# EAGLE board heating-controller (EAGLE 6.4)
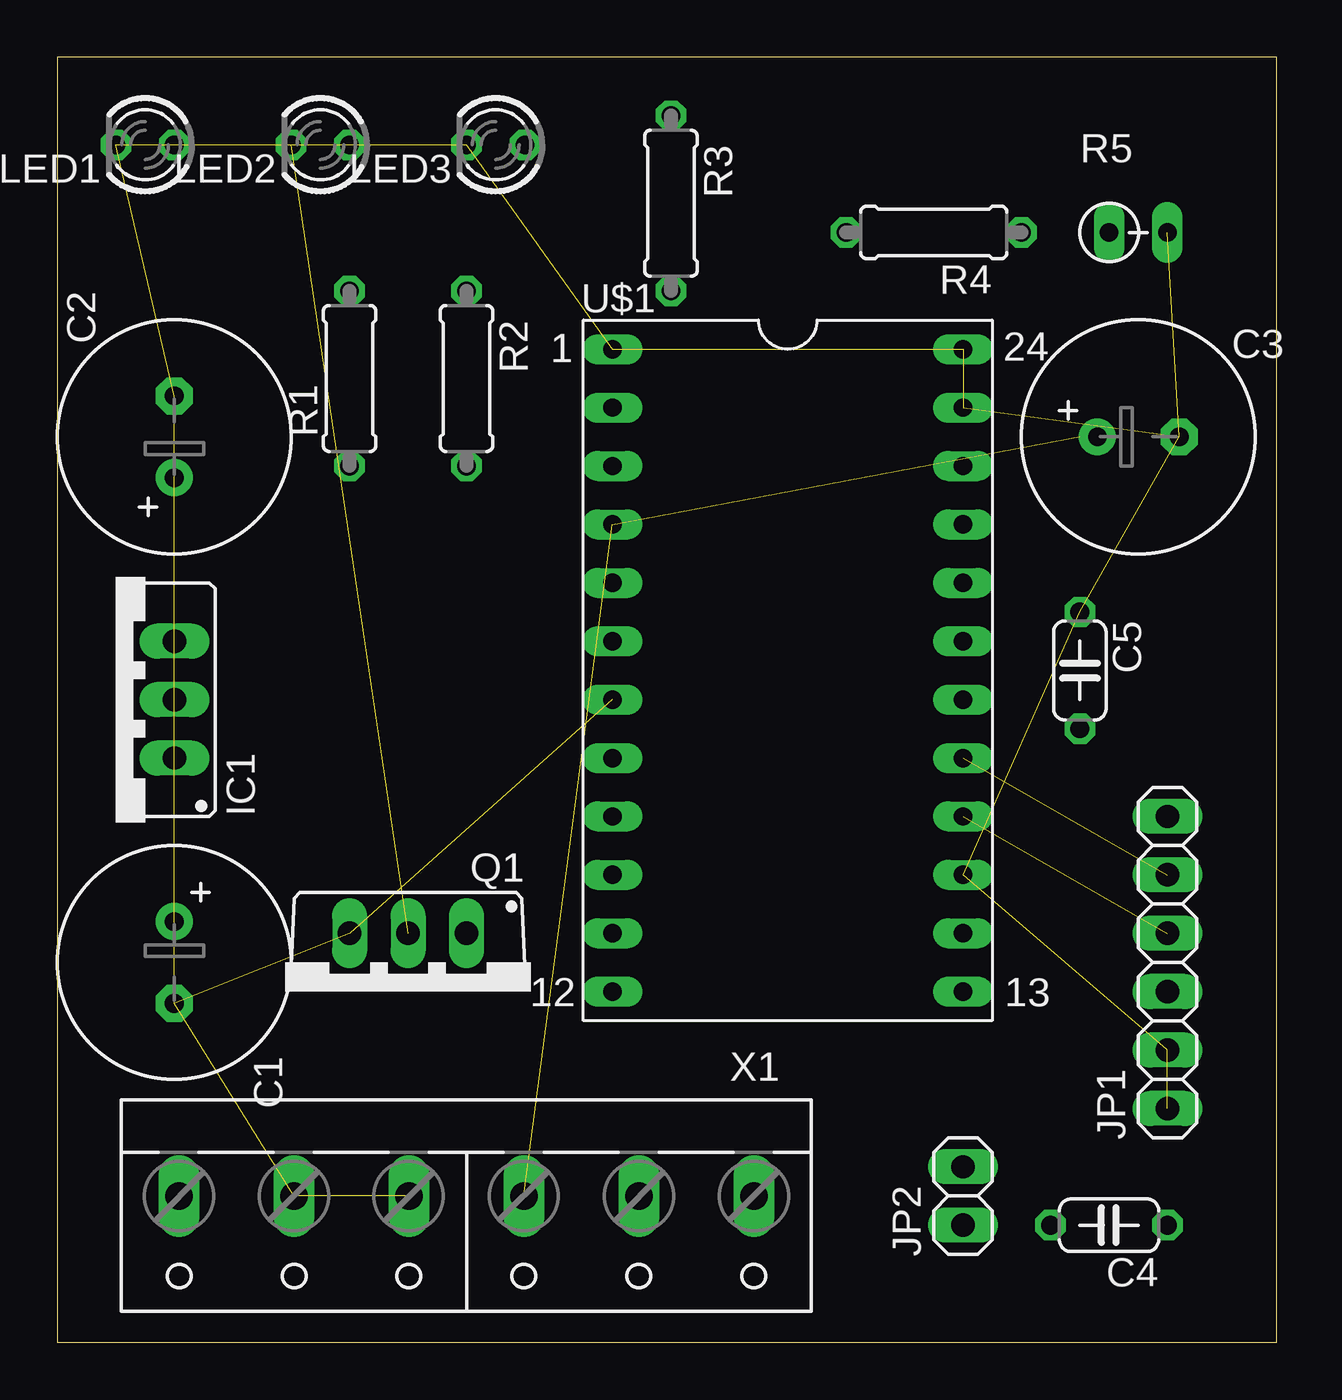
[diagram p0: board, top side]
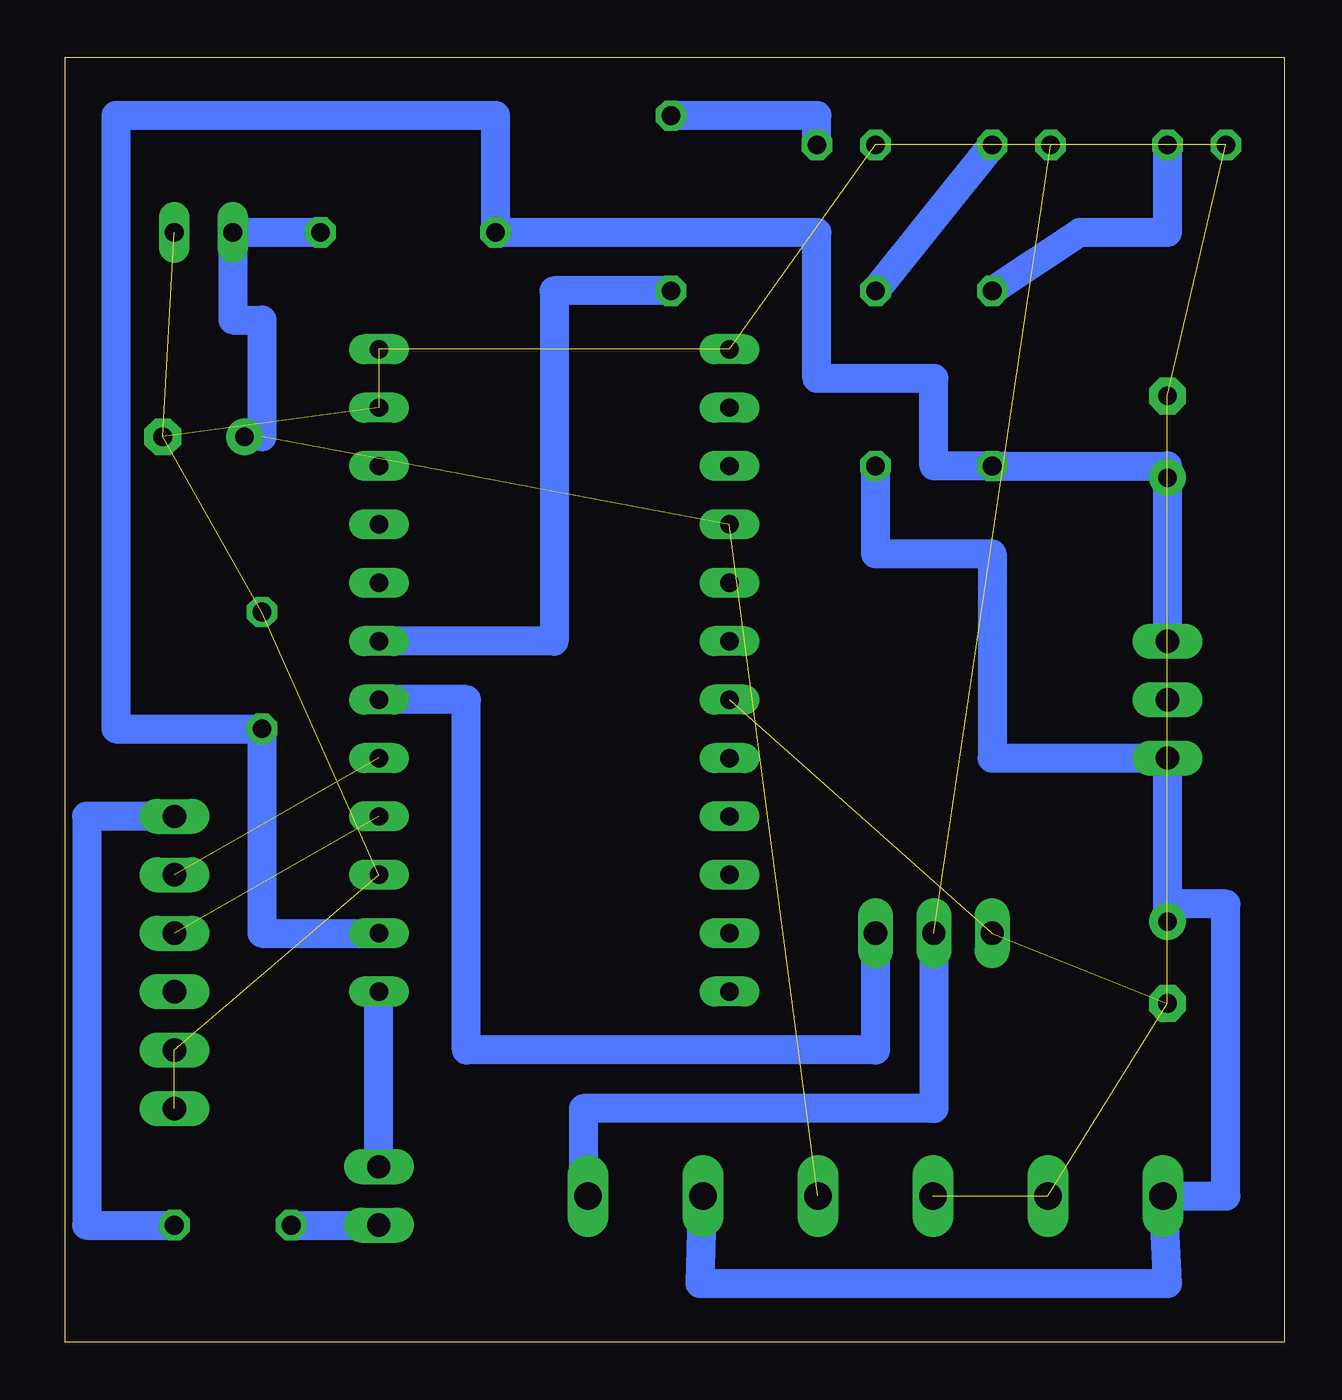
[diagram p1: board, bottom side, seen from below]

Size 53.01 x 55.87 mm. Coordinates in mm from the lower left corner, seen from the top.
Outline: 0,0 53.01,0 53.01,55.87 0,55.87 0,0
Copper layers (1*16): Top 0.035mm / dielectric 1.5mm / Bottom 0.035mm
Design rules "default": minimum track width 10mil, minimum drill 24mil, track to track 8mil, track to pad 8mil, pad to pad 8mil, via to via 8mil, smd to smd 8mil, copper to edge 40mil, drill to drill 8mil, minimum pad ring 10mil, minimum via ring 8mil, stop-mask expansion 4mil, vias tented up to drill 0mil, thermal gap 10mil

## Footprints (pad centres in the part's own frame; a part is rotated, then mirrored left to right if it is on the bottom)
E3,5-10 = drill 0.813 pad 1.6: + -1.778,0 | drill 0.813 pad 1.6 octagon: - 1.778,0
C050-024X044 = drill 0.813 octagon: 1 -2.54,0; 2 2.54,0
78XXS = drill 1.016 long: GND 0,-2.54; IN -2.54,-2.54; OUT 2.54,-2.54
1X06 = drill 1.016 long: 1 -6.35,0; 2 -3.81,0; 3 -1.27,0; 4 1.27,0; 5 3.81,0; 6 6.35,0
1X02 = drill 1.016 long: 1 -1.27,0; 2 1.27,0
LED3MM = drill 0.813 octagon: A -1.27,0; K 1.27,0
TO220BV = drill 1.016 long: D 0,-2.54; G -2.54,-2.54; S 2.54,-2.54
0207/7 = drill 0.813 octagon: 1 -3.81,0; 2 3.81,0
RS-2,5 = drill 0.813 long: 1 -1.27,0; 2 1.27,0
DIL24-6 = drill 0.8 long: 1 -7.62,13.97; 2 -7.62,11.43; 3 -7.62,8.89; 4 -7.62,6.35; 5 -7.62,3.81; 6 -7.62,1.27; 7 -7.62,-1.27; 8 -7.62,-3.81; 9 -7.62,-6.35; 10 -7.62,-8.89; 11 -7.62,-11.43; 12 -7.62,-13.97; 13 7.62,-13.97; 14 7.62,-11.43; 15 7.62,-8.89; 16 7.62,-6.35; 17 7.62,-3.81; 18 7.62,-1.27; 19 7.62,1.27; 20 7.62,3.81; 21 7.62,6.35; 22 7.62,8.89; 23 7.62,11.43; 24 7.62,13.97
W237-6 = drill 1.194 long: 1 -12.5,-1.27; 2 -7.5,-1.27; 3 -2.5,-1.27; 4 2.5,-1.27; 5 7.5,-1.27; 6 12.5,-1.27

## Placement (x,y rotation side)
C1  100uF  [E3,5-10]  5.08,16.51 270 top
C2  100uF  [E3,5-10]  5.08,39.37 90 top
C3  4.7uF  [E3,5-10]  46.99,39.37 0 top
C4  100nF  [C050-024X044]  45.72,5.08 180 top
C5  100nF  [C050-024X044]  44.45,29.21 270 top
IC1  AP1117T33L-U  [78XXS]  2.54,27.94 90 top
JP1  [1X06]  48.26,16.51 90 top
JP2  [1X02]  39.37,6.35 90 top
LED1  [LED3MM]  3.81,52.07 180 top
LED2  [LED3MM]  11.43,52.07 180 top
LED3  [LED3MM]  19.05,52.07 180 top
Q1  IRLB8721PBF  [TO220BV]  15.24,15.24 180 top
R1  220R  [0207/7]  12.7,41.91 90 top
R2  1K  [0207/7]  17.78,41.91 270 top
R3  220R  [0207/7]  26.67,49.53 270 top
R4  1K  [0207/7]  38.1,48.26 180 top
R5  538-0806  [RS-2,5]  46.99,48.26 0 top
U$1  PANSTAMPPANSTAMP  [DIL24-6]  31.75,29.21 0 top
X1  [W237-6]  17.78,5.08 180 top

## Library data of the parts
C1-C5 R1-R4 = rcl
IC1 = v-reg
JP1 JP2 = pinhead
LED1-LED3 = led
Q1 = transistor-power
R5 = varistor
U$1 = panstamp
X1 = con-wago-500; OC_FARNELL: unknown; OC_NEWARK: unknown

## Nets
+5V: JP1.3
+12V: C1.+ IC1.IN R2.2 X1.2 X1.6
GND: C1.- C2.- C3.- C5.1 IC1.GND JP1.1 JP1.2 LED1.K LED3.K Q1.S R5.2 U$1.1 U$1.7 U$1.15 U$1.23 U$1.24 X1.4 X1.5
N$1: C3.+ R4.1 R5.1 U$1.4 X1.3
N$2: R3.2 U$1.19
N$3: LED2.K Q1.D X1.1
N$4: LED1.A R1.2
N$5: LED2.A R2.1
N$6: LED3.A R3.1
N$7: Q1.G U$1.18
N$9: JP1.4 U$1.16
N$10: JP1.5 U$1.17
N$12: C4.1 JP1.6
N$13: C4.2 JP2.1
N$14: JP2.2 U$1.13
VCC: C2.+ C5.2 IC1.OUT R1.1 R4.2 U$1.14

## Tracks (layer width: path | path; a pad name or v marks a point on that pad's centre or on a via)
+12V
  Bottom 1.27: 5.08,19.05 IC1.IN 12.7,25.4 12.7,34.29 17.78,34.29 R2.2 | 5.08,19.05 C1.+ | 5.08,19.05 2.54,19.05 2.54,6.35 X1.6 5.08,2.54 25.4,2.54 X1.2
GND  (17 unrouted)
N$1  (2 unrouted)
  Bottom 1.27: R4.1 R5.1 45.72,44.45 44.45,44.45 44.45,39.37 C3.+
N$2
  Bottom 1.27: R3.2 31.75,45.72 31.75,30.48 U$1.19
N$3  (1 unrouted)
  Bottom 1.27: Q1.D 15.24,10.16 30.48,10.16 30.48,6.35 X1.1
N$4
  Bottom 1.27: LED1.A 5.08,48.26 8.89,48.26 R1.2
N$5
  Bottom 1.27: LED2.A R2.1
N$6
  Bottom 1.27: LED3.A 20.32,53.34 R3.1
N$7
  Bottom 1.27: Q1.G 17.78,12.7 35.56,12.7 35.56,27.94 U$1.18
N$9  (1 unrouted)
N$10  (1 unrouted)
N$12
  Bottom 1.27: JP1.6 52.07,22.86 52.07,5.08 C4.1
N$13
  Bottom 1.27: C4.2 JP2.1
N$14
  Bottom 1.27: JP2.2 U$1.13
VCC
  Bottom 1.27: IC1.OUT C2.+ 5.08,38.1 R1.1 15.24,38.1 15.24,41.91 20.32,41.91 20.32,48.26 R4.2 34.29,53.34 50.8,53.34 50.8,26.67 C5.2 44.45,17.78 U$1.14